# EAGLE board Wrist2 (EAGLE 8.6.0)
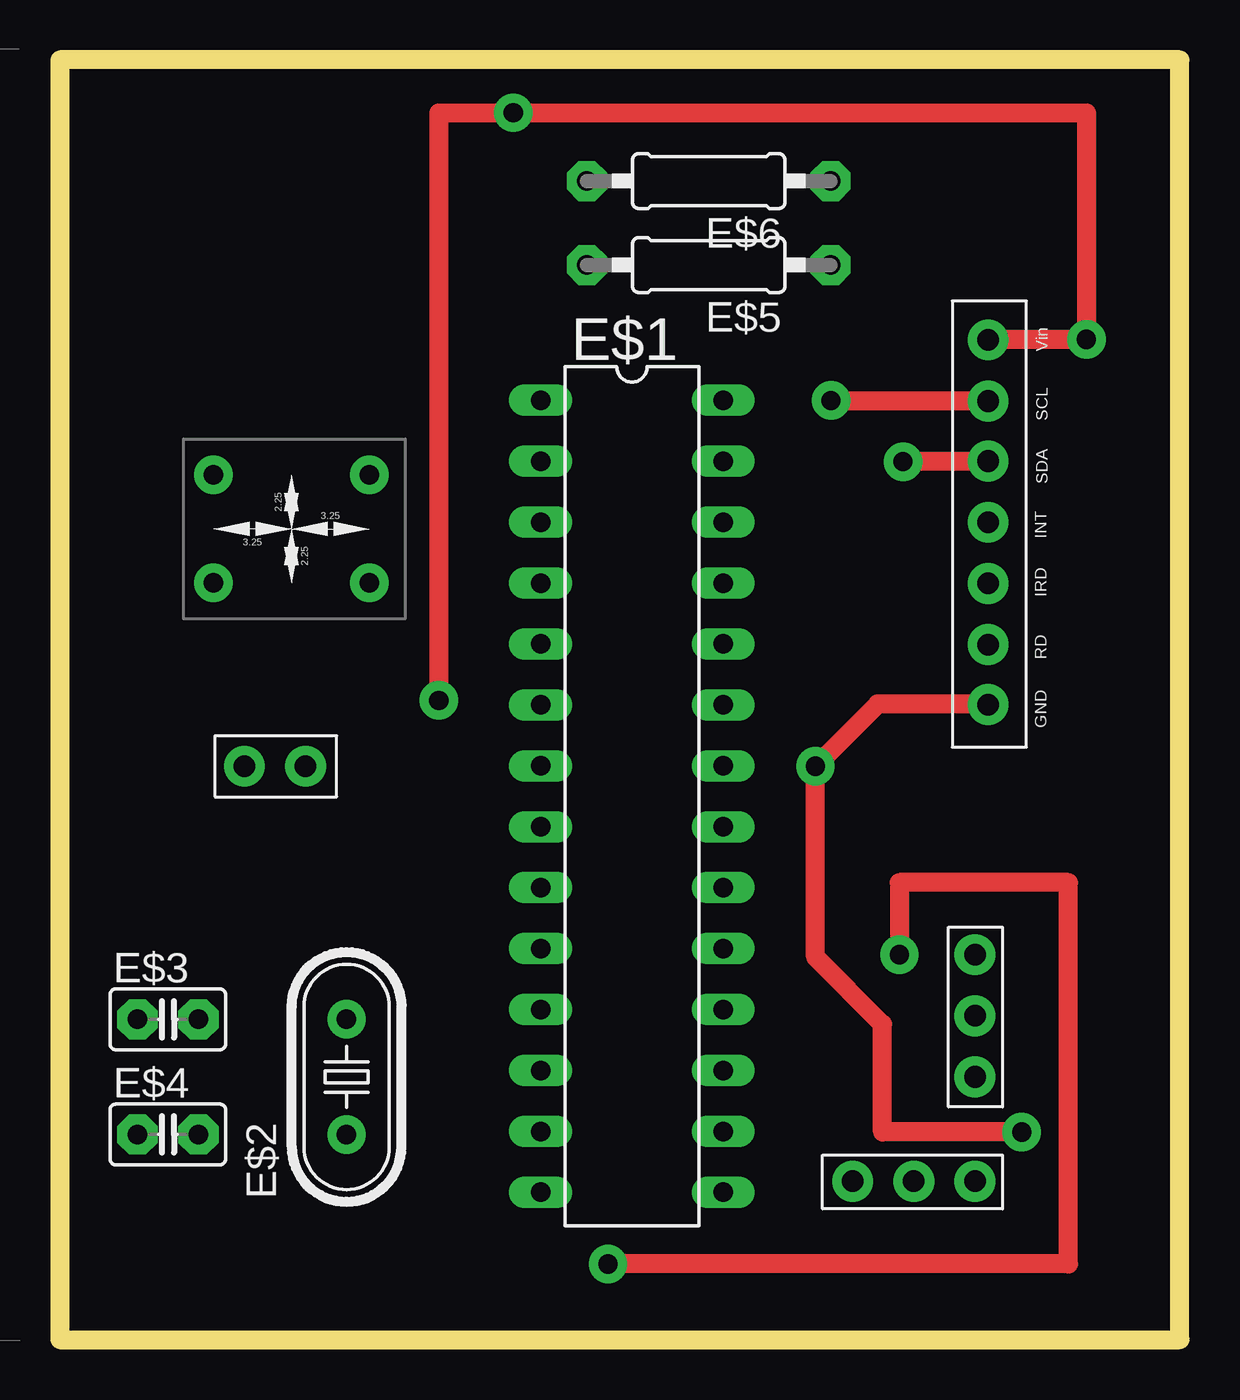
[diagram p0: board, top side]
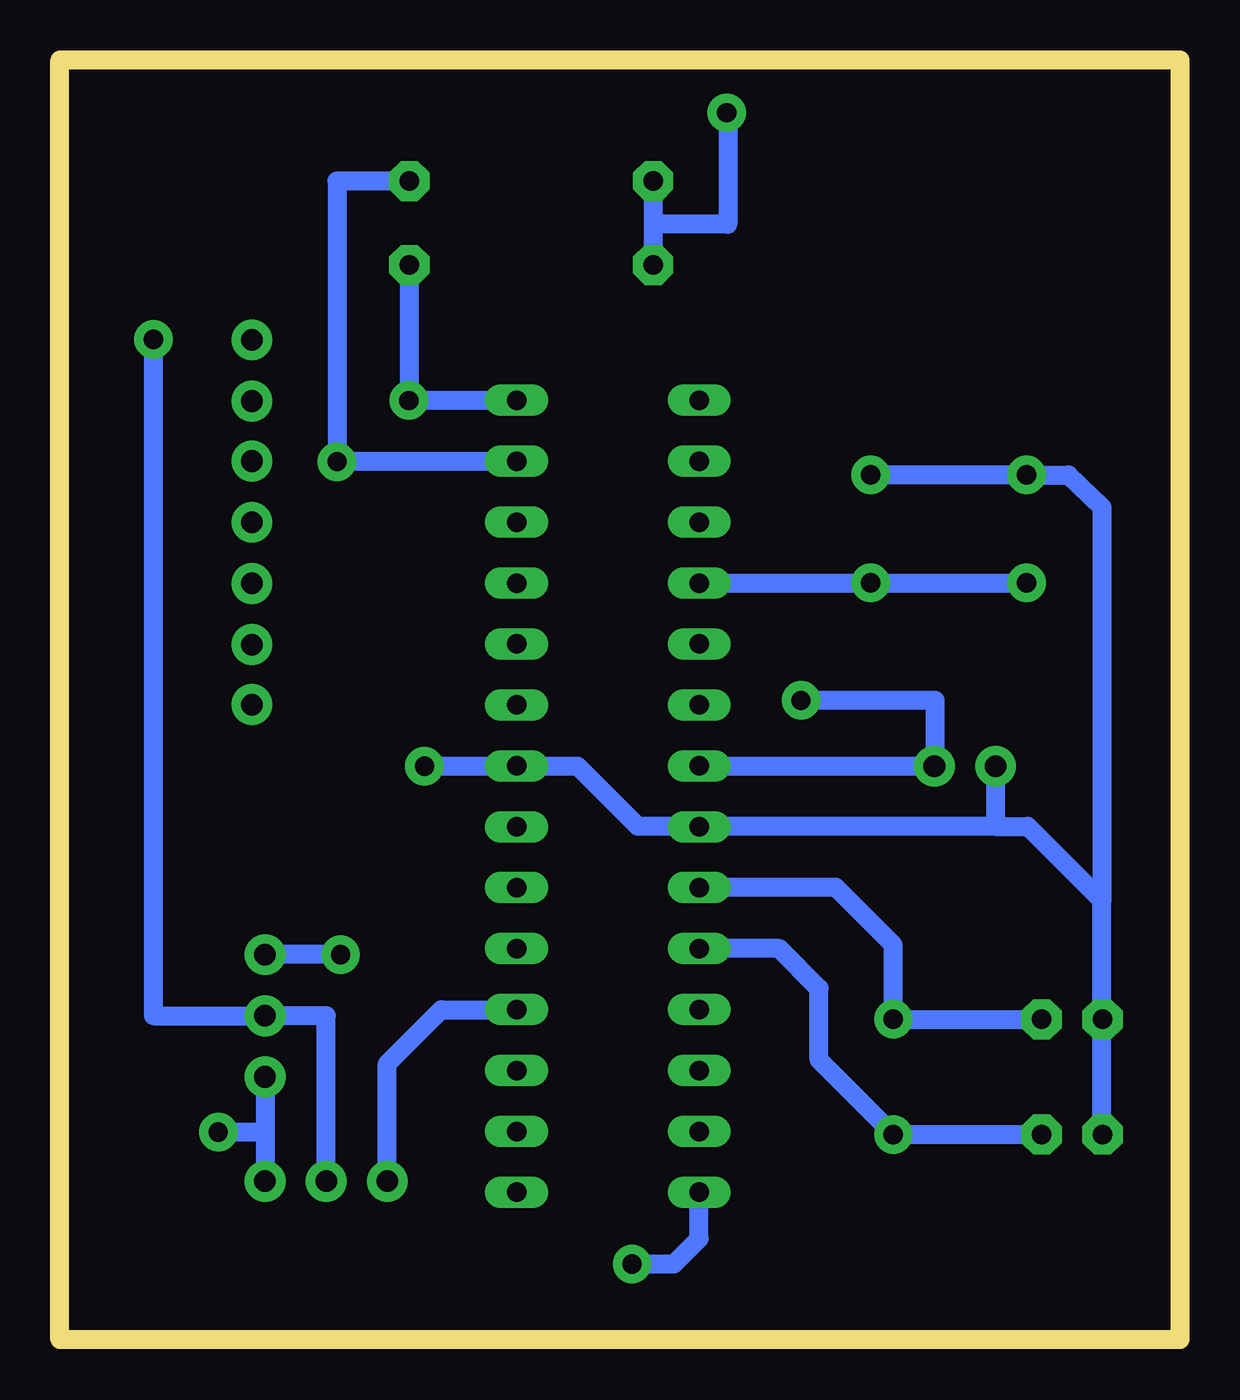
[diagram p1: board, bottom side, seen from below]

Size 46.7 x 53.35 mm. Coordinates in mm from the lower left corner, seen from the top.
Outline: 46.7,53.35 0,53.35 0,0 46.7,0 46.7,53.35
Copper layers (1*16): Top 0.035mm / dielectric 1.5mm / Bottom 0.035mm
Design rules "default": minimum track width 6mil, minimum drill 0.35mm, track to track 6mil, track to pad 6mil, pad to pad 6mil, via to via 6mil, smd to smd 6mil, copper to edge 40mil, drill to drill 6mil, minimum pad ring 10mil, minimum via ring 8mil, stop-mask expansion 4mil, vias tented up to drill 0mil, thermal gap 10mil

## Footprints (pad centres in the part's own frame; a part is rotated, then mirrored left to right if it is on the bottom)
DIL28-3$ = drill 0.813 long: 1 -16.51,-3.81; 2 -13.97,-3.81; 3 -11.43,-3.81; 4 -8.89,-3.81; 5 -6.35,-3.81; 6 -3.81,-3.81; 7 -1.27,-3.81; 8 1.27,-3.81; 9 3.81,-3.81; 10 6.35,-3.81; 11 8.89,-3.81; 12 11.43,-3.81; 13 13.97,-3.81; 14 16.51,-3.81; 15 16.51,3.81; 16 13.97,3.81; 17 11.43,3.81; 18 8.89,3.81; 19 6.35,3.81; 20 3.81,3.81; 21 1.27,3.81; 22 -1.27,3.81; 23 -3.81,3.81; 24 -6.35,3.81; 25 -8.89,3.81; 26 -11.43,3.81; 27 -13.97,3.81; 28 -16.51,3.81
HC49U-V_ME = drill 0.813 pad 1.6: 1 -2.413,0; 2 2.413,0
C025-025X050 = drill 0.813 pad 1.676 octagon: 1 -1.27,0; 2 1.27,0
0207/10 = drill 0.813 pad 1.676 octagon: 1 -5.08,0; 2 5.08,0
PIN_HEADER_7X1_GP = drill 0.9 pad 1.7: P$1 -3.825,0; P$2 -1.275,0; P$3 1.275,0; P$4 3.825,0; P$5 6.325,0; P$6 -6.325,0; P$7 -8.875,0
PIN_HEADER_3X1_GP = drill 0.9 pad 1.7: P$1 0,0; P$2 2.55,0; P$3 -2.55,0
PUSH_BUTTON = drill 0.8 pad 1.6: P$1 -2.25,3.25; P$2 2.25,3.25; P$3 2.25,-3.25; P$4 -2.25,-3.25
PIN_HEADER_2X1_GP = drill 0.9 pad 1.7: P$1 -1.31,0; P$2 1.24,0

## Placement (x,y rotation side)
E$1  [DIL28-3$]  23.85,22.65 270 top
E$2  [HC49U-V_ME]  11.95,10.95 90 top
E$3  [C025-025X050]  4.5,13.35 0 top
E$4  [C025-025X050]  4.5,8.55 0 top
E$5  4.7k  [0207/10]  27.05,44.8 180 top
E$6  4.7k  [0207/10]  27.05,48.3 180 top
E$7  [PIN_HEADER_7X1_GP]  38.7,32.8 270 top
E$8  [PIN_HEADER_3X1_GP]  38.15,13.5 90 top
E$9  [PUSH_BUTTON]  9.65,33.8 90 top
E$10  [PIN_HEADER_2X1_GP]  9,23.9 0 top
E$11  [PIN_HEADER_3X1_GP]  35.6,6.6 0 top

## Library data of the parts
E$1 = avr-6
E$2-E$6 = adafruit
E$7 E$8 = Pin_header
E$9-E$11 = custom components

## Nets
S$2: E$8.P$3 E$9.P$2
S$5: E$9.P$1
S$6: E$8.P$1 E$11.P$1
S$9: E$11.P$3
S$10: E$8.P$2

## Tracks (layer width: path | path; a pad name or v marks a point on that pad's centre or on a via)
S$2  (via drill 0.8 pad 1.6)
  Top 0.8: v40.1,8.65 34.3,8.65 34.3,13.15 31.5,15.95 v31.5,23.9 34.1,26.5 38.7,26.5
  Bottom 0.8: 7.7,23.9 7.7,21.4 | 7.7,21.4 22.6,21.4 25.1,23.9 v31.5,23.9 | 7.7,21.4 6.35,21.4 3.25,18.3 | 3.25,8.55 3.25,18.3 | 3.25,18.3 3.25,34.7 4.65,36.05 E$9.P$2 12.95,36.05 | E$8.P$3 38.15,8.65 | 38.15,8.65 38.15,6.6 | v40.1,8.65 38.15,8.65
S$3  (via drill 0.8 pad 1.6)
  Top 0.8: v32.15,39.15 38.7,39.15
  Bottom 0.8: 27.6,39.15 v32.15,39.15 32.15,44.8
S$4  (via drill 0.8 pad 1.6)
  Top 0.8: 38.7,36.6 v35.15,36.6
  Bottom 0.8: 27.65,36.6 v35.15,36.6 35.15,48.3 32.15,48.3
S$5
  Bottom 0.8: 20.05,31.55 E$9.P$1
S$6  (via drill 0.8 pad 1.6)
  Top 0.8: v15.8,26.65 15.8,51.15 v18.9,51.15 42.8,51.15 v42.8,41.7 38.7,41.7
  Bottom 0.8: v42.8,41.7 42.8,13.5 E$8.P$1 35.6,13.5 E$11.P$1 | 20.05,23.9 10.2,23.9 10.2,26.65 v15.8,26.65 | v18.9,51.15 18.85,51.15 18.85,46.5 21.95,46.5 | 21.95,44.8 21.95,46.5 | 21.95,46.5 21.95,48.3
S$7
  Bottom 0.8: 20.05,18.85 14.35,18.85 11.95,16.45 11.95,13.35 5.75,13.35
S$9
  Bottom 0.8: E$11.P$3 33.05,11.5 30.8,13.75 27.65,13.75
S$10  (via drill 0.8 pad 1.6)
  Top 0.8: v22.85,3.15 42.05,3.15 42.05,19.05 35,19.05 v35,16.05
  Bottom 0.8: v22.85,3.15 21.1,3.15 20.05,4.2 20.05,6.15 | v35,16.05 E$8.P$2
S$14
  Bottom 0.8: 20.05,16.3 16.7,16.3 15.05,14.65 15.05,11.65 11.95,8.55 5.75,8.55

## Text on the board
tDocu: data | VCC | GND | servo